# EAGLE board thresholdboard (EAGLE 9.7.0)
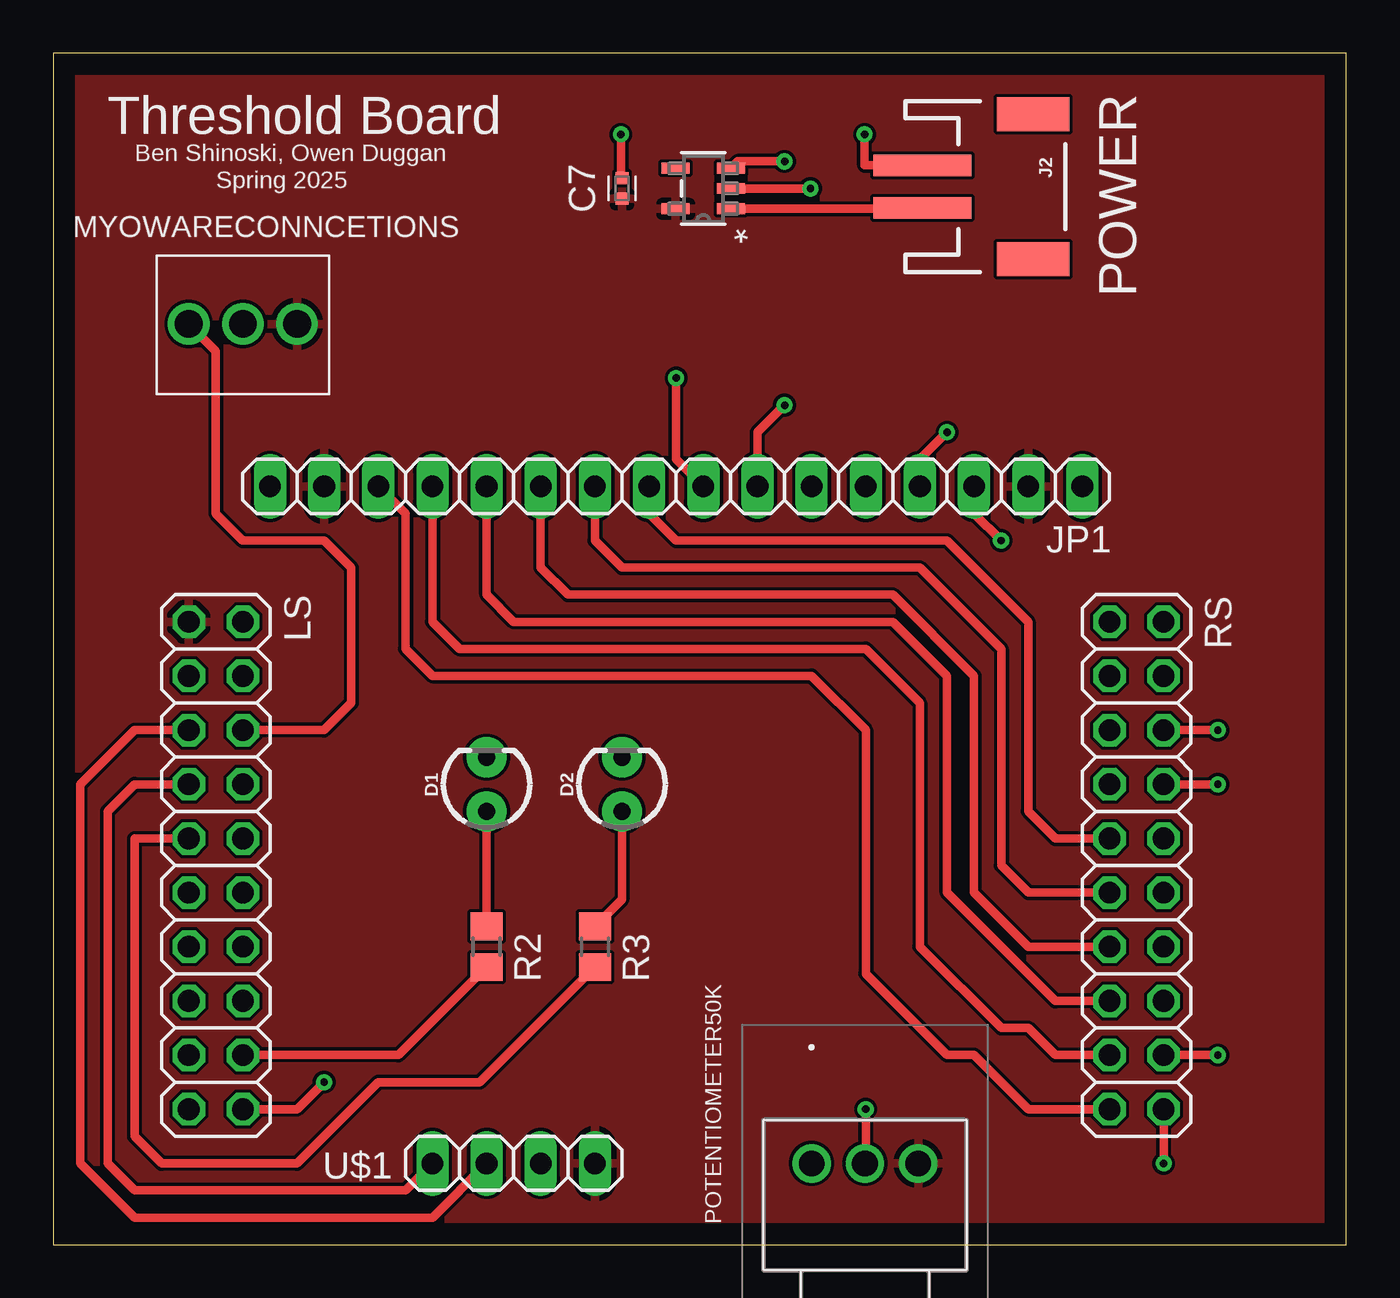
[diagram p0: board, top side]
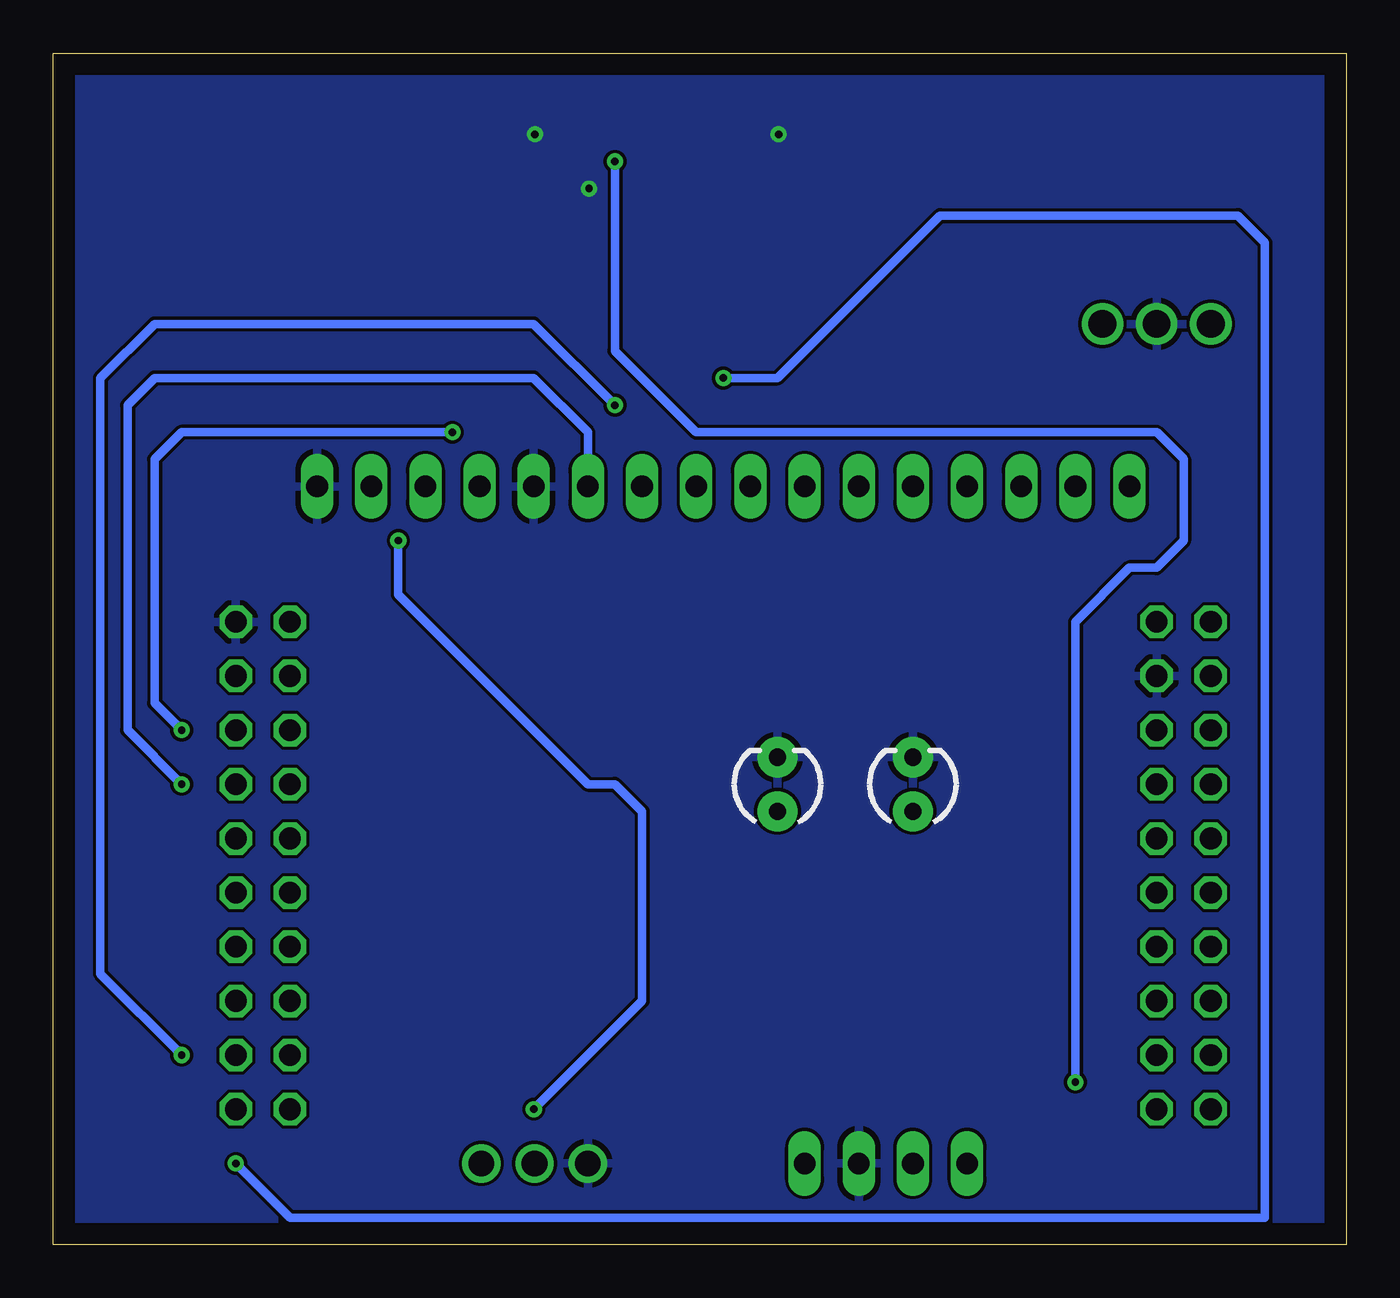
[diagram p1: board, bottom side, seen from below]

Size 60.63 x 55.87 mm. Coordinates in mm from the lower left corner, seen from the top.
Outline: 0,0 60.63,0 60.63,55.87 0,55.87 0,0
Copper layers (1*16): Top 0.035mm / dielectric 1.5mm / Bottom 0.035mm
Design rules "Fusion Electronics Design Rules": minimum track width 6mil, minimum drill 0.35mm, track to track 6mil, track to pad 6mil, pad to pad 6mil, via to via 6mil, smd to smd 6mil, copper to edge 40mil, drill to drill 6mil, minimum pad ring 10mil, minimum via ring 8mil, stop-mask expansion 4mil, vias tented up to drill 0mil, thermal gap 10mil

## Footprints (pad centres in the part's own frame; a part is rotated, then mirrored left to right if it is on the bottom)
CAPC1005X60 = smd 0.56 x 0.629: 1 -0.485,0; 2 0.485,0
LED_3MM = drill 0.813 pad 1.88: A -1.27,0; K 1.27,0
JST-2-SMD = smd 1 x 4.6: 1 -1,-3.7; 2 1,-3.7 | smd 1.6 x 3.4: NC1 -3.4,1.5; NC2 3.4,1.5
1X16 = drill 1.016 long: 1 -19.05,0; 2 -16.51,0; 3 -13.97,0; 4 -11.43,0; 5 -8.89,0; 6 -6.35,0; 7 -3.81,0; 8 -1.27,0; 9 1.27,0; 10 3.81,0; 11 6.35,0; 12 8.89,0; 13 11.43,0; 14 13.97,0; 15 16.51,0; 16 19.05,0
2X10 = drill 1.016 octagon: 1 -11.43,-1.27; 2 -11.43,1.27; 3 -8.89,-1.27; 4 -8.89,1.27; 5 -6.35,-1.27; 6 -6.35,1.27; 7 -3.81,-1.27; 8 -3.81,1.27; 9 -1.27,-1.27; 10 -1.27,1.27; 11 1.27,-1.27; 12 1.27,1.27; 13 3.81,-1.27; 14 3.81,1.27; 15 6.35,-1.27; 16 6.35,1.27; 17 8.89,-1.27; 18 8.89,1.27; 19 11.43,-1.27; 20 11.43,1.27
OSTVNXXA150 = drill 1.3: 1 -2.54,0; 2 0,0; 3 2.54,0
PTD9011015KA504 = drill 1.2 pad 1.8: 1 -2.54,-2.54; 2 -2.54,-0.04; 3 -2.54,2.46
R0805 = smd 1.3 x 1.5: 1 -0.95,0; 2 0.95,0
SOT-23-5_MC_MCH = smd 1.321 x 0.508: 1 -1.295,0.95; 2 -1.295,0; 3 -1.295,-0.95; 4 1.295,-0.95; 5 1.295,0.95
1X04 = drill 1.016 long: 1 -3.81,0; 2 -1.27,0; 3 1.27,0; 4 3.81,0

## Placement (x,y rotation side)
C7  [CAPC1005X60]  26.67,49.53 90 top
D1  [LED_3MM]  20.32,21.59 90 top
D2  [LED_3MM]  26.67,21.59 90 top
J2  [JST-2-SMD]  44.45,49.62 270 top
JP1  PINHD-1X16  [1X16]  29.21,35.56 180 top
LS  [2X10]  7.62,17.78 270 top
MYOWARECONNCETIONS  OSTVNXXA150_3PIN_TERM  [OSTVNXXA150]  8.89,43.18 180 top
POTENTIOMETER50K  PTD901-1015K-A504  [PTD9011015KA504]  38.1,1.27 270 top
R2  360Ω  [R0805]  20.32,13.97 270 top
R3  360Ω  [R0805]  25.4,13.97 270 top
RS  [2X10]  50.8,17.78 90 top
U1  TC1055-3.6VCT713  [SOT-23-5_MC_MCH]  30.48,49.53 180 top
U$1  PINHD-1X04_1X04M  [1X04]  21.59,3.81 0 top

## Library data of the parts
C7 = Capacitor; CATEGORY: Capacitor; PACKAGE_SIZE: 0402; PACKAGE_TYPE: SMD; SUBCATEGORY: Ceramic Capacitors; TYPE: MLCC
D1 D2 = SparkFun-LED; PROD_ID: DIO-08794
J2 = SparkFun-Connectors; PROD_ID: CONN-11443; SF_ID: PRT-08612
JP1 = Connector; CATEGORY: Headers; DESCRIPTION: Header-Straight-16 Position; PACKAGE_TYPE: THT; PITCH: 0.100" (2.54mm); SUBCATEGORY: Headers-Male Pins; TYPE: Board to Board or Cable-Unshrouded-Through Hole-Straight
LS RS = pinhead
MYOWARECONNCETIONS = PulseOximeterECG_AU
POTENTIOMETER50K = F1-Steeringwheel; DESCRIPTION: PTD90 Series - 9 mm Multi-Ganged Potentiometer; HEIGHT: 11.6mm; MANUFACTURER_NAME: Bourns; MANUFACTURER_PART_NUMBER: PTD901-1015K-A504; MOUSER_PART_NUMBER: 652-PTD901-1015KA504; MOUSER_PRICE-STOCK: https://www.mouser.co.uk/ProductDetail/Bourns/PTD901-1015K-A504?qs=pxDZlBjcsCjzOrwLTKFEOw%3D%3D
R2 R3 = rcl; SPICEPREFIX: R
U1 = TC1055; COPYRIGHT: Copyright (C) 2025 Ultra Librarian. All rights reserved.; MANUFACTURER_PART_NUMBER: TC1055-3.6VCT713; MFR_NAME: Microchip
U$1 = Tinkercad

## Nets
3V6: C7.1 JP1.2 JP1.15 LS.1 MYOWARECONNCETIONS.1 POTENTIOMETER50K.3 U1.5 U$1.4
5V: LS.2
GND: C7.2 D1.K D2.K J2.1 JP1.1 JP1.5 LS.4 MYOWARECONNCETIONS.2 POTENTIOMETER50K.1 RS.19 U1.2 U$1.3
N$1: D1.A R2.1
N$2: D2.A R3.1
N$4: JP1.16
P1.3/A3: LS.11
P1.4/A4: LS.14
P1.5/A5: LS.16
P2.5/GPIO: JP1.11 RS.8
P2.6/GPIO: JP1.10 RS.10
P3.0/A12: LS.6 MYOWARECONNCETIONS.3
P3.1/A13: LS.8
P3.2/A14: LS.10
P3.3/A15: LS.12
P3.4/GPIO: RS.14
P3.5/GPIO: RS.16
P3.6/GPIO: RS.18
P3.7/GPIO: RS.20
P4.1/GPIO: JP1.14 RS.2
P4.2/GPIO: JP1.13 RS.4
P4.3/GPIO: JP1.12 RS.6
P4.4/GPIO: JP1.4 RS.15
P4.7/GPIO: LS.18 R2.2
P5.0/MOSI: RS.9
P5.1/MISO: RS.7
P5.2/UCB1CLK: LS.13
P5.3/GPIO: JP1.6 RS.13
P5.7/GPIO: RS.17
P6.0/UCA3TXD: LS.7 U$1.1
P6.1/UCA3RXD: LS.5 U$1.2
P6.2/GPIO: LS.9 R3.2
P6.3/GPIO: LS.15
P7.0/UCB2SDA: LS.19
P7.1/UCB2SCL: LS.17
P7.3/GPIO: JP1.9 RS.12
P8.0/GPIO: LS.20 U1.3
P8.1/GPIO: JP1.8 RS.1
P8.2/GPIO: JP1.7 RS.3
P8.3/GPIO: RS.5
RST: RS.11
TEMPOUT(P1.2/A2): LS.3
V0: JP1.3 POTENTIOMETER50K.2
VIN: U1.1

## Tracks (layer width: path | path; a pad name or v marks a point on that pad's centre or on a via)
3V6
  pour Top: -6.01,-6.15 66.97,-6.15 67.11,-6.01 67.11,63.3 -6.15,63.3 -6.15,-6.01
GND  (via drill 0.35)
  Top 0.406: 40.64,50.62 J2.1 38.05,50.62 v38.05,52.07 | v26.62,52.07 26.62,50.07 C7.2 | U1.2 v35.51,49.53
  pour Bottom: -2.2,-2.34 63.3,-2.34 63.3,59.35 63.16,59.49 -2.34,59.49 -2.34,-2.2
N$1
  Top 0.406: D1.A R2.1
N$2
  Top 0.406: D2.A 26.67,16.19 R3.1
P2.5/GPIO
  Top 0.406: JP1.11 22.86,31.75 24.13,30.48 39.37,30.48 43.18,26.67 43.18,16.51 45.72,13.97 RS.8
P2.6/GPIO
  Top 0.406: JP1.10 25.4,33.02 26.67,31.75 40.64,31.75 44.45,27.94 44.45,17.78 45.72,16.51 RS.10
P3.0/A12
  Top 0.406: MYOWARECONNCETIONS.3 7.62,41.91 7.62,34.29 8.89,33.02 12.7,33.02 13.97,31.75 13.97,25.4 12.7,24.13 LS.6
P4.1/GPIO
  Top 0.406: JP1.14 16.51,34.29 16.51,27.94 17.78,26.67 35.56,26.67 38.1,24.13 38.1,12.7 41.91,8.89 43.18,8.89 45.72,6.35 RS.2
P4.2/GPIO
  Top 0.406: JP1.13 17.78,29.21 19.05,27.94 38.1,27.94 40.64,25.4 40.64,13.97 44.45,10.16 45.72,10.16 46.99,8.89 RS.4
P4.3/GPIO
  Top 0.406: RS.6 46.99,11.43 41.91,16.51 41.91,26.67 39.37,29.21 21.59,29.21 20.32,30.48 JP1.12
P4.4/GPIO  (via drill 0.35)
  Top 0.406: JP1.4 40.64,36.83 v41.91,38.1 | RS.15 v54.61,24.13
  Bottom 0.406: v54.61,24.13 55.88,25.4 55.88,36.83 54.61,38.1 v41.91,38.1
P4.7/GPIO
  Top 0.406: R2.2 16.19,8.89 LS.18
P5.3/GPIO  (via drill 0.35)
  Top 0.406: RS.13 v54.61,21.59
  Bottom 0.406: JP1.6 35.56,38.1 38.1,40.64 55.88,40.64 57.15,39.37 57.15,24.13 v54.61,21.59
P6.0/UCA3TXD
  Top 0.406: U$1.1 16.51,2.54 3.81,2.54 2.54,3.81 2.54,20.32 3.81,21.59 LS.7
P6.1/UCA3RXD
  Top 0.406: U$1.2 17.78,1.27 3.81,1.27 1.27,3.81 1.27,21.59 3.81,24.13 LS.5
P6.2/GPIO
  Top 0.406: R3.2 20,7.62 15.24,7.62 11.43,3.81 5.08,3.81 3.81,5.08 3.81,19.05 LS.9
P7.3/GPIO
  Top 0.406: JP1.9 27.94,34.29 29.21,33.02 41.91,33.02 45.72,29.21 45.72,20.32 46.99,19.05 RS.12
P8.0/GPIO  (via drill 0.35)
  Top 0.406: U1.3 32.09,50.8 v34.29,50.8 | v12.7,7.62 11.43,6.35 LS.20
  Bottom 0.406: v34.29,50.8 34.29,41.91 30.48,38.1 8.89,38.1 7.62,36.83 7.62,33.02 8.89,31.75 10.16,31.75 12.7,29.21 v12.7,7.62
P8.1/GPIO  (via drill 0.35)
  Top 0.406: JP1.8 29.21,36.83 v29.21,40.64 | v52.07,3.81 RS.1
  Bottom 0.406: v29.21,40.64 26.67,40.64 19.05,48.26 5.08,48.26 3.81,46.99 3.81,1.27 49.53,1.27 v52.07,3.81
P8.2/GPIO  (via drill 0.35)
  Top 0.406: JP1.7 33.02,38.1 v34.29,39.37 | RS.3 v54.61,8.89
  Bottom 0.406: v34.29,39.37 38.1,43.18 55.88,43.18 58.42,40.64 58.42,12.7 v54.61,8.89
V0  (via drill 0.35)
  Top 0.406: POTENTIOMETER50K.2 38.1,3.85 v38.1,6.35 | v44.45,33.02 43.18,34.29 JP1.3
  Bottom 0.406: v44.45,33.02 44.45,30.48 35.56,21.59 34.29,21.59 33.02,20.32 33.02,11.43 v38.1,6.35
VIN
  Top 0.406: U1.1 40.64,48.58 40.71,48.58

## Text on the board
tNames: Threshold Board | Ben Shinoski, Owen Duggan | Spring 2025 | POWER